# EAGLE board VW_PCB (EAGLE 9.4.2)

No outline drawn. Coordinates in mm, seen from the top.
Copper layers (1*16): Top 0.035mm / dielectric 1.5mm / Bottom 0.035mm
Design rules "default": minimum track width 6mil, minimum drill 0.35mm, track to track 6mil, track to pad 6mil, pad to pad 6mil, via to via 6mil, smd to smd 6mil, copper to edge 40mil, drill to drill 6mil, minimum pad ring 10mil, minimum via ring 8mil, stop-mask expansion 4mil, vias tented up to drill 0mil, thermal gap 10mil

## Footprints (pad centres in the part's own frame; a part is rotated, then mirrored left to right if it is on the bottom)
ARDUINO_R3 = drill 1.016 pad 1.93: A0 17.78,-24.13; A1 20.32,-24.13; A2 22.86,-24.13; A3 25.4,-24.13; A3V 2.54,-24.13; A4 27.94,-24.13; A5 30.48,-24.13; A5V 5.08,-24.13; AREF -9.144,24.13; D0 30.48,24.13; D1 27.94,24.13; D2 25.4,24.13; D3 22.86,24.13; D4 20.32,24.13; D5 17.78,24.13; D6 15.24,24.13; D7 12.7,24.13; D8 8.636,24.13; D9 6.096,24.13; D10 3.556,24.13; D11 1.016,24.13; D12 -1.524,24.13; D13 -4.064,24.13; GND1 7.62,-24.13; GND2 10.16,-24.13; GND3 -6.604,24.13; IOREF -2.54,-24.13; NC -5.08,-24.13; RESET 0,-24.13; ROW1 -15.24,8.636; ROW2 -15.24,6.096; ROW3 -15.24,3.556; ROW4 -15.24,1.016; ROW5 -15.24,-1.524; ROW6 -15.24,-4.064; ROW7 -15.24,-6.604; ROW8 -15.24,-9.144; ROW9 21.59,8.636; ROW10 21.59,6.096; ROW11 21.59,3.556; ROW12 21.59,1.016; ROW13 21.59,-1.524; ROW14 21.59,-4.064; ROW15 21.59,-6.604; ROW16 21.59,-9.144; SCL -14.224,24.13; SDA -11.684,24.13; VIN 12.7,-24.13 | hole 3.175: -18.034,24.13; 33.02,8.89; 33.02,-19.05; -19.05,-24.13

## Placement (x,y rotation side)
E$1  [ARDUINO_R3]  33.02,26.67 0 top

## Library data of the parts
E$1 = VirtualWire

## Nets
S$1: E$1.GND1 E$1.ROW1 E$1.ROW3
S$2: E$1.A5V E$1.ROW6 E$1.ROW11
S$3: E$1.ROW4 E$1.ROW13
S$4: E$1.GND2 E$1.ROW16
S$5: E$1.ROW5 E$1.ROW10

## Tracks (layer width: path | path; a pad name or v marks a point on that pad's centre or on a via)
S$1  (2 unrouted)
S$2  (2 unrouted)
S$3  (1 unrouted)
S$4  (1 unrouted)
S$5  (1 unrouted)